# Altium PCB version_1.PcbDoc
Units mm, origin at the board's own origin, x right, y up, seen from the top; angles counter-clockwise.
Board outline 81.67 x 20.7 mm, 2 copper layers (Top Layer, Bottom Layer), stack 1.671 mm thick; 19 components, 16 nets, 82 pads, 0 vias.
Unrouted connection lines stored in the file: 46.
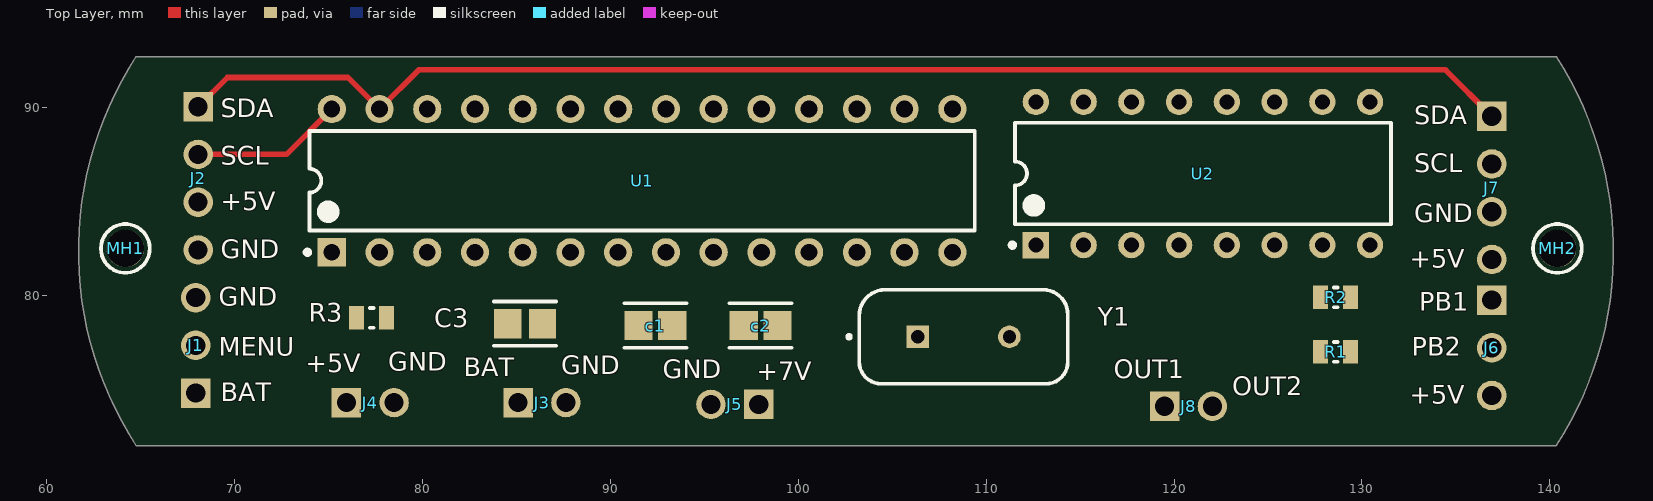
[diagram p0: Top Layer view]
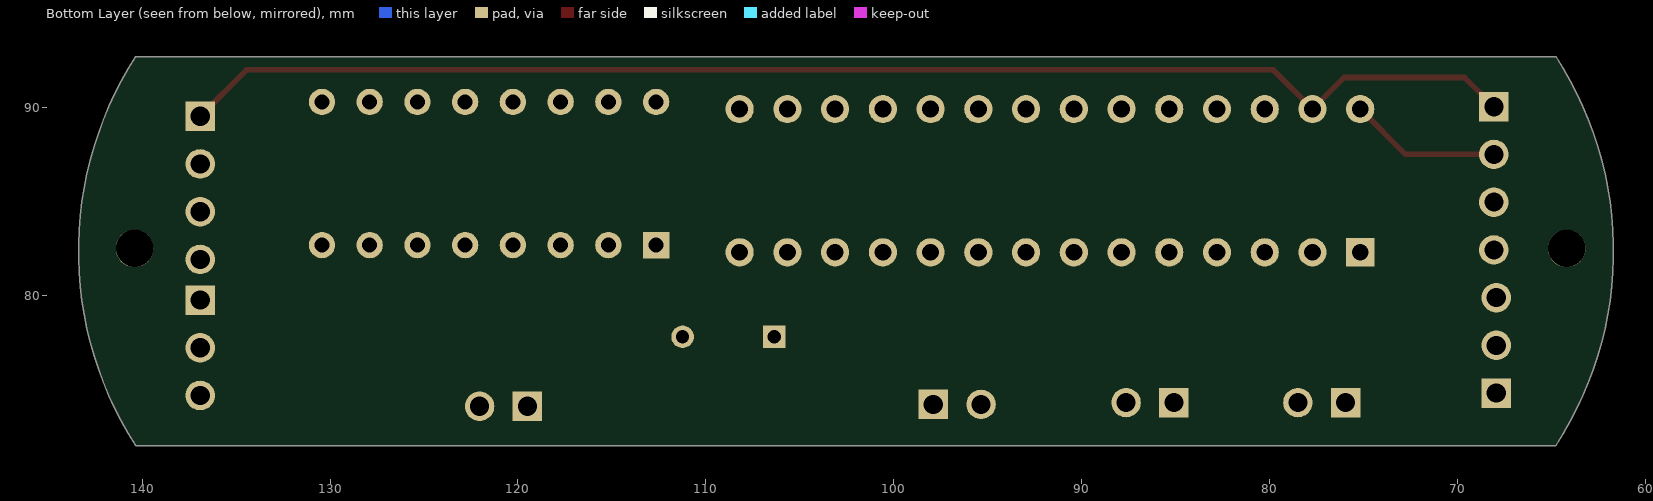
[diagram p1: Bottom Layer view, seen from below]

## Layer stack, top to bottom
Top Solder: solder mask 0.0102, Solder Resist, Dk 3.5
Top Layer: signal copper 0.0356
Dielectric 1: dielectric 1.6, FR-4, Dk 4.8
Bottom Layer: signal copper 0.0356
Bottom Solder: solder mask 0.0102, Solder Resist, Dk 3.5

## Board outline
64.77,72.009 cw(c80.725,82.359) 64.77,92.71 140.335,92.71 cw(c124.287,82.359) 140.335,72.009

## Design rules (kind name [scope] priority, off if disabled: settings)
AssemblyTestpoint [All] p1: testpointundercomponent=TRUE minsize=0.7 maxsize=2.54 preferedsize=0.7 minholesize=0 maxholesize=1.016 preferedholesize=0.3 testpointgrid=0.025 usegrid=TRUE gridtolerance=0 allowsidetop=TRUE allowsidebottom=TRUE
Clearance [All] p1: gap=0.254 ignorepadtopadclearanceinfootprint=FALSE except(0.33: Arc-Hole Track-Hole; 0.5: THPad-THPad)
FabricationTestpoint [All] p1: side=3 testpointundercomponent=TRUE minsize=0.7 maxsize=2.54 preferedsize=0.7 minholesize=0 maxholesize=1.016 preferedholesize=0.3 testpointgrid=0.025 allowsidetop=TRUE allowsidebottom=TRUE usegrid=TRUE gridtolerance=0
HoleSize [All] p1: absolutevalues=TRUE maxlimit=10 minlimit=0.2 maxpercent=80.000 minpercent=20.000
HoleToHoleClearance [All] p1: gap=0.5 allowstackedmicrovias=TRUE
PolygonConnect [All] p1: connectstyle=Relief reliefconductorwidth=0.254 reliefentries=4 polygonreliefangle="90 Angle" airgapwidth=0.254
RoutingVias [All] p1: holewidth=0.711 width=1.27 viastyle="Through Hole" minholewidth=0.3 minwidth=0.5 maxholewidth=0.711 maxwidth=1.27
SolderMaskExpansion [All] p1: expansion=0.102 istentingtop=FALSE
Width Power_nets [InNet('GND') or InNet('BAT') or InNet('+5V') or InNet('7V')] p1: maxlimit=4 minlimit=0.4 preferedwidth=0.4
Width [All] p2: maxlimit=0.5 minlimit=0.3 preferedwidth=0.3
26 further rules are at their usual default settings.

## Components (designator, comment, footprint, x,y, rotation, side; value= is the part's Value field where it differs from the comment)
c1 "22pF" "0805 22pf" 92.4,78.4 r180 top
c2 "22pF" "0805 22pf" 98,78.4 r180 top
C3 "10uf" "0805 cap" 85.474,78.5 r0 top
J1 "PAD3 1.02X1.57MM" "PAD3 1.02X1.57MM" 67.945,74.803 r180 top
J2 "PAD4 1.02X1.57MM" "PAD4 1.02X1.57MM" 68.072,90.043 r0 top
J3 "PAD2 1.02X1.57MM" "PAD2 1.02X1.57MM" 85.1,74.3 r90 top
J4 "PAD2 1.02X1.57MM" "PAD2 1.02X1.57MM" 75.96,74.3 r90 top
J5 "PAD2 1.02X1.57MM" "PAD2 1.02X1.57MM" 97.9,74.2 r270 top
J6 "PAD3 1.02X1.57MM" "PAD3 1.02X1.57MM" 136.906,79.756 r0 top
J7 "PAD4 1.02X1.57MM" "PAD4 1.02X1.57MM" 136.906,89.535 r0 top
J8 "PAD2 1.02X1.57MM" "PAD2 1.02X1.57MM" 119.5,74.1 r90 top
MH1 "MH" MH 64.169,82.535 r0 top
MH2 "MH" MH 140.369,82.535 r0 top
R1 "10k" "0805 resistor" 128.6,77 r0 top
R2 "10k" "0805 resistor" 128.6,79.9 r0 top
R3 "10k" "0805 resistor" 77.3,78.8 r0 top
U1 "ATMEGA328-PU" "DIP28 7.62MM" 91.694,86.106 r90 top locked
U2 "L293D" DIP16 121.539,86.487 r90 top locked
Y1 "HC49US16MHz" HC49US16MHz 108.8,77.8 r0 top

## Footprints (in the part's own frame and the unit in brackets; to place one, negate y for a bottom-side part, rotate by r counter-clockwise, add the part's x,y. Pads: shape width x height; smd on the part's side, far side on the other; paste and mask are expansions set on the pad)
"0805 22pf" [mm]
  rect 1.505x1.556 smd paste+0 mask+0: 1(-0.901,0) 2(0.901,0)
  silkscreen extent -1.65,-1.18 1.65,1.18, body extent -2.15,-1.28 2.15,1.28, height 0.25
"0805 cap" [mm]
  rect 1.455x1.556 smd paste+0 mask+0: 1(-0.926,0) 2(0.926,0)
  silkscreen extent -1.65,-1.18 1.65,1.18, body extent -2.15,-1.28 2.15,1.28, height 0.25
"0805 resistor" [mm]
  rect 0.8x1.25 smd: 1(-0.8,0) 2(0.8,0)
  silkscreen extent -0.1,-0.52 0.1,0.53, body extent -1.05,-0.67 1.05,0.68, height 0.6
DIP16 [mm]
  rect 1.4x1.4 hole 0.8: 1(-3.81,8.89)
  round 1.4 hole 0.8: 2(-3.81,6.35) 3(-3.81,3.81) 4(-3.81,1.27) 5(-3.81,-1.27) 6(-3.81,-3.81) 7(-3.81,-6.35) 8(-3.81,-8.89) 9(3.81,-8.89) 10(3.81,-6.35) 11(3.81,-3.81) 12(3.81,-1.27) 13(3.81,1.27) 14(3.81,3.81) 15(3.81,6.35) 16(3.81,8.89)
  silkscreen extent -3.93,-10 2.7,10.26, body extent -3.93,-10 3.93,10, height 5.1
"DIP28 7.62MM" [mm]
  rect 1.5x1.5 hole 0.9: 1(-3.81,16.51)
  round 1.5 hole 0.9: 2(-3.81,13.97) 3(-3.81,11.43) 4(-3.81,8.89) 5(-3.81,6.35) 6(-3.81,3.81) 7(-3.81,1.27) 8(-3.81,-1.27) 9(-3.81,-3.81) 10(-3.81,-6.35) 11(-3.81,-8.89) 12(-3.81,-11.43) 13(-3.81,-13.97) 14(-3.81,-16.51) 15(3.81,-16.51) 16(3.81,-13.97) 17(3.81,-11.43) 18(3.81,-8.89) 19(3.81,-6.35) 20(3.81,-3.81) 21(3.81,-1.27) 22(3.81,1.27) 23(3.81,3.81) 24(3.81,6.35) 25(3.81,8.89) 26(3.81,11.43) 27(3.81,13.97) 28(3.81,16.51)
  silkscreen extent -3.93,-17.7 2.65,17.93, body extent -3.94,-17.91 3.94,18.03, height 4.65
HC49US16MHz [mm]
  rect 1.2x1.2 hole 0.7: 1(-2.44,0)
  round 1.2 hole 0.7: 2(2.44,0)
  silkscreen extent -6.2,-2.5 5.55,2.5, body extent -5.4,-2.25 5.4,2.25, height 3.6
MH [mm]
  round 2 hole 2: 1(0.031,-0.035)
  silkscreen extent -1.27,-1.33 1.33,1.26
"PAD2 1.02X1.57MM" [mm]
  rect 1.57x1.57 hole 1.02: 1(0,0)
  round 1.57 hole 1.02: 2(0,-2.54)
"PAD3 1.02X1.57MM" [mm]
  rect 1.57x1.57 hole 1.02: 1(0,0)
  round 1.57 hole 1.02: 2(0,-2.54) 3(0,-5.08)
"PAD4 1.02X1.57MM" [mm]
  rect 1.57x1.57 hole 1.02: 1(0,0)
  round 1.57 hole 1.02: 2(0,-2.54) 3(0,-5.08) 4(0,-7.62)

## Part data
c1 c2: library part C0805C220J4HACTU, Manufacturer=KEMET, Supplier Part Number 1=80-C0805C220J4HACTU, Category="Ceramic Capacitors", Manufacturer Part Number=C0805C220J4HACTU, Pricing 1="1=0.17, 10=0.08, 50=0.08, 100=0.036, 1000=0.02, 10000=0.016 (USD)", RoHS=Yes, RoHS Compliant=Yes, Stock 1=17911, Supplier 1=Mouser
C3: library part CL21A106KOQNNNE, "-", Capacitance=10uF, Case Code (Imperial)=0805, Case Code (Metric)=2012, Dielectric=X7R, Manufacturer=Samsung, Max Operating Temperature=85°C, Min Operating Temperature=-55°C, Package Quantity=1, Tolerance=10%, Voltage=16V, Case/Package=0805, Category="Ceramic Capacitors", Construction=Flat, Depth=1.25mm, Height=1.25mm, Lead Free="Lead Free", Length=2mm, Manufacturer Part Number=CL21A106KOQNNNE, Mount="Surface Mount", Packaging="Tape and Reel", Pricing 1="2000=0.0165, 4000=0.0156, 10000=0.0122, 14000=0.0121, 50000=0.0096, 100000=0.0083, 200000=0.0072 (USD)", Radiation Hardening=No, RoHS=Yes, RoHS Compliant=Yes, Series=CL, Stock 1=1702000, Supplier 1="Arrow Electronics", Supplier Part Number 1=CL21A106KOQNNNE, Thickness=0.055inch, Voltage Rating=16V, Voltage Rating (DC)=16V, Width=0.049inch
R1 R2 R3: library part RC0805FR-0710KL, "Res Thick Film 0805 10K Ohm 1% 0.125W(1/8W) +/-100ppm/C Epoxy Pad SMD T/R", Case Code (Imperial)=0805, Case Code (Metric)=2012, Manufacturer=Yageo, Max Operating Temperature=155°C, Max Power Dissipation=125mW, Min Operating Temperature=-55°C, Package Quantity=1, Resistance=10kR, Resistance Tolerance=1%, Resistor Type="Thick Film", Supplier Part Number 1=3310877, Temperature Coefficient=100ppm/°C, Voltage Rating=150V, Case/Package=0805, Category="Chip SMD Resistors", ComponentLink1Description=https://datasheet.ciiva.com/11808/0900766b8106beab-11808151.pdf?src-supplier=Rs, ComponentLink1URL=https://datasheet.ciiva.com/11808/0900766b8106beab-11808151.pdf?src-supplier=Rs, ComponentLink2Description=https://datasheet.ciiva.com/46447/444164-46447563.pdf?src-supplier=Element14, ComponentLink2URL=https://datasheet.ciiva.com/46447/444164-46447563.pdf?src-supplier=Element14, ComponentLink3Description=https://datasheet.ciiva.com/2456/pyu-r-int-thick-7-2456973.pdf?src-supplier=Digi-Key, ComponentLink3URL=https://datasheet.ciiva.com/2456/pyu-r-int-thick-7-2456973.pdf?src-supplier=Digi-Key, ComponentLink4Description=https://datasheet.ciiva.com/2456/pyu-r-int-thick-7-2456974.pdf?src-supplier=Digi-Key, ComponentLink4URL=https://datasheet.ciiva.com/2456/pyu-r-int-thick-7-2456974.pdf?src-supplier=Digi-Key, ComponentLink5Description=https://datasheet.ciiva.com/2456/pyu-r-int-thick-7-2456972.pdf?src-supplier=Digi-Key, ComponentLink5URL=https://datasheet.ciiva.com/2456/pyu-r-int-thick-7-2456972.pdf?src-supplier=Digi-Key, ComponentLink6Description=https://datasheet.ciiva.com/12669/rc0805-12669688.pdf?src-supplier=Mouser, ComponentLink6URL=https://datasheet.ciiva.com/12669/rc0805-12669688.pdf?src-supplier=Mouser, ComponentLink7Description=https://datasheet.ciiva.com/16747/rc0805-16747087.pdf?src-supplier=Future+Electronics, ComponentLink7URL=https://datasheet.ciiva.com/16747/rc0805-16747087.pdf?src-supplier=Future+Electronics, Construction=Rectangular, Depth=1.25mm, Features="Moisture Resistant", Height=0.024inch, Lead Free="Lead Free", Length=0.079inch, Manufacturer Part Number=RC0805FR-0710KL, Military Standard=Not, Number of Terminations=2, Packaging="Tape and Reel", Power Rating=125mW, Pricing 1="5000=0.0027, 25000=0.0025, 50000=0.0025, 125000=0.0023, 200000=0.0024, 375000=0.0022, 625000=0.0023, 1000000=0.0021, 2000000=0.0021 (USD)", Reach SVHC Compliant=Unknown, RoHS=Yes, RoHS Compliant=Yes, Series=RC, Size Code=0805, Stock 1=3435000, Supplier 1="Future Electronics", Technology="THICK FILM", Termination=SMD/SMT, Tolerance=1%, Width=0.049inch
U1: "ATmega Series 32 kB Flash 2 kB SRAM 20 MHz 8-Bit Microcontroller - DIP-28", Case/Package=PDIP, Frequency=20MHz, Manufacturer=Microchip, Max Operating Temperature=85°C, Max Supply Voltage=5.5V, Min Operating Temperature=-40°C, Min Supply Voltage=1.8V, Supplier Part Number 1=1310277P, Core Architecture=AVR, Data Bus Width=8b, Height=4.572mm, Lead Free="Lead Free", Length=34.8mm, Manufacturer Part Number=ATMEGA328-PU, Max Frequency=20MHz, Memory Size=32KB, Memory Type=FLASH, Mount="Through Hole", Number of ADC Channels=6, Number of I2C Channels=1, Number of I/Os=23, Number of Pins=28, Number of PWM Channels=6, Number of SPI Channels=1, Number of Timers/Counters=3, Peripherals=POR,PWM,WDT, Pricing 1="25=0.41080, 100=0.39560 (GBP)", RAM Size=2KB, Reach SVHC Compliant=No, RoHS=Yes, RoHS Compliant=Yes, Stock 1=871, Supplier 1=Rs, Watchdog Timer=Yes, Width=7.49mm
U2: "IC MOTOR DRIVER PAR 16-DIP", Case/Package=DIP, Manufacturer=STMicroelectronics, Max Collector Current=1.2A, Max Operating Temperature=150°C, Max Supply Voltage=36V, Min Operating Temperature=-40°C, Min Supply Voltage=4.5V, Operating Supply Current=2mA, Operating Supply Voltage=24V, Output Current=600mA, Power Dissipation=4W, Supplier Part Number 1=511-L293D, Category="Motor Drivers", ComponentLink1Description=https://datasheet.ciiva.com/14150/ocl293d-647107-dat-en-14150297.pdf?src-supplier=Distrelec, ComponentLink1URL=https://datasheet.ciiva.com/14150/ocl293d-647107-dat-en-14150297.pdf?src-supplier=Distrelec, ComponentLink2Description=https://datasheet.ciiva.com/15109/getdatasheetpartid-121660-15109379.pdf?src-supplier=Verical, ComponentLink2URL=https://datasheet.ciiva.com/15109/getdatasheetpartid-121660-15109379.pdf?src-supplier=Verical, ComponentLink3Description=https://datasheet.ciiva.com/29307/156134-da-01-en-4-kanal-treiber-ic-l293d-stm-29307000.pdf?src-supplier=Conrad, ComponentLink3URL=https://datasheet.ciiva.com/29307/156134-da-01-en-4-kanal-treiber-ic-l293d-stm-29307000.pdf?src-supplier=Conrad, ComponentLink4Description=https://datasheet.ciiva.com/1955/cd00000059-1955400.pdf?src-supplier=Digi-Key, ComponentLink4URL=https://datasheet.ciiva.com/1955/cd00000059-1955400.pdf?src-supplier=Digi-Key, ComponentLink5Description=https://datasheet.ciiva.com/4895/cd00000059-4895945.pdf?src-supplier=Mouser, ComponentLink5URL=https://datasheet.ciiva.com/4895/cd00000059-4895945.pdf?src-supplier=Mouser, ComponentLink6Description=https://datasheet.ciiva.com/16458/cd00000059-16458220.pdf?src-supplier=Future+Electronics, ComponentLink6URL=https://datasheet.ciiva.com/16458/cd00000059-16458220.pdf?src-supplier=Future+Electronics, Height=5.1mm, Interface=Parallel, Lead Free="Lead Free", Length=20mm, Manufacturer Part Number=L293D, Motor Type=Brushed, Mount="Through Hole", Number of Channels=4, Number of Outputs=2, Number of Pins=16, Packaging=Rail/Tube, Pricing 1="1=8.52000, 10=7.70000, 50=7.34000, 100=6.37000, 1000=5.07000, 10000=5.07000 (USD)", Radiation Hardening=No, RoHS=Yes, RoHS Compliant=Yes, Series=-, Stock 1=664, Supplier 1=Mouser, Width=7.1mm
Y1: library part HC49US16.384MABJ-UB, "CRYSTAL 16.384MHZ 18PF THROUGH HOLE; Frequency: 16.384MHz; Frequency Tolerance: ± 30ppm; Load Capacitance: 18pF;...", ESR (Equivalent Series Resistance)=50R, Frequency=16.384MHz, Frequency Stability=50ppm, Frequency Tolerance=30ppm, Load Capacitance=18pF, Manufacturer=Citizen, Max Operating Temperature=60°C, Min Operating Temperature=-10°C, Operating Frequency="16.384 MHz", Package Quantity=1000, Supplier Part Number 1=1078922, Category=Uncategorized, ComponentLink1Description=https://datasheet.ciiva.com/856/hc-49-u-s-856176.pdf?src-supplier=Digi-Key, ComponentLink1URL=https://datasheet.ciiva.com/856/hc-49-u-s-856176.pdf?src-supplier=Digi-Key, ComponentLink2Description=https://datasheet.ciiva.com/16440/hc-49-u-s-16440933.pdf?src-supplier=Future+Electronics, ComponentLink2URL=https://datasheet.ciiva.com/16440/hc-49-u-s-16440933.pdf?src-supplier=Future+Electronics, ComponentLink3Description=https://datasheet.ciiva.com/28624/9028-28624744.pdf?src-supplier=Element14, ComponentLink3URL=https://datasheet.ciiva.com/28624/9028-28624744.pdf?src-supplier=Element14, Height=0.138inch, Lead Free="Lead Free", Length=0.453inch, Manufacturer Part Number=HC49US16.384MABJ-UB, Mount="Through Hole", Packaging=Bulk, Pricing 1="1000=0.30200 (GBP)", Reach SVHC Compliant=Unknown, RoHS=Yes, Series=HC-49US, Supplier 1=Farnell, Width=0.183inch

## Nets (pads, with @x,y where several pads share a name; then routed paths per layer and width w, separated by ;. In a path a pad name is that pad's centre, name@x,y a point inside that pad or via, vN(x,y) a via of type N, cw(c..) or ccw(c..) an arc to the next point about the centre after c; other vN are vias at no path point)
7V: J5.1 U2.8
+5: C3.2 J2.3 J4.1 J6.3 J7.4 R3.2 U1.7 U1.20 U2.1 U2.9 U2.16
BAT: J1.1 J3.1 U1.25
GND: c1.2 c2.2 C3.1 J1.3 J2.4 J3.2 J4.2 J5.2 J7.3 MH1.1 MH2.1 R1.2 R2.2 U1.8 U1.22 U2.4 U2.5 U2.12 U2.13
INPUT1: U1.13 U2.2
INPUT2: U1.14 U2.7
MENU: J1.2 U1.24
NetR3_1: R3.1 U1.1
OUTPUT1: J8.1 U2.3
OUTPUT2: J8.2 U2.6
PB1: J6.1 R2.1 U1.4
PB2: J6.2 R1.1 U1.5
SCL: J2.2 J7.2 U1.28 | length 8.1
  Top Layer w0.3: J2.2 72.771,87.503 U1.28
SDA: J2.1 J7.1 U1.27 | length 72.1
  Top Layer w0.3: J2.1 69.629,91.6 76.04,91.6 U1.27 79.808,92 134.441,92 J7.1
XTAL1: c1.1 U1.9 Y1.1
XTAL2: c2.1 U1.10 Y1.2
pads on no net: U1.2 U1.3 U1.6 U1.11 U1.12 U1.15 U1.16 U1.17 U1.18 U1.19 U1.21 U1.23 U1.26 U2.10 U2.11 U2.14 U2.15

## Silkscreen, mask and mechanical layers (free items; w line width, h text height)
Top Overlay:
  text "SDA" at 69.288,89.481 h1
  text "SDA" at 132.788,89.1 h1
  text "SCL" at 69.288,86.941 h1
  text "SCL" at 132.788,86.56 h1
  text "+5V" at 69.288,84.528 h1
  text "GND" at 132.788,83.893 h1
  text "GND" at 69.288,81.988 h1
  text "+5V" at 132.534,81.48 h1
  text "GND" at 69.161,79.448 h1
  text "PB1" at 133.042,79.194 h1
  text "MENU" at 69.161,76.781 h1
  text "PB2" at 132.661,76.781 h1
  text "GND" at 78.2,76 h1
  text "+5V" at 73.8,75.9 h1
  text "GND" at 87.4,75.8 h1
  text "BAT" at 82.2,75.7 h1
  text "GND" at 92.8,75.6 h1
  text "OUT1" at 116.8,75.6 h1
  text "+7V" at 97.8,75.5 h1
  text "OUT2" at 123.1,74.7 h1
  text "BAT" at 69.288,74.368 h1
  text "+5V" at 132.534,74.241 h1
Top Assembly:
  the board outline again, w0.2